# Altium PCB compactv2.PcbDoc
Units mm, origin at the board's own origin, x right, y up, seen from the top; angles counter-clockwise.
Board outline 100 x 100 mm, 4 copper layers (LV, Power Loops, HV Power, HV Signal), stack 1.369 mm thick; 57 components, 98 nets, 117 pads, 0 vias.
Unrouted connection lines stored in the file: 2.
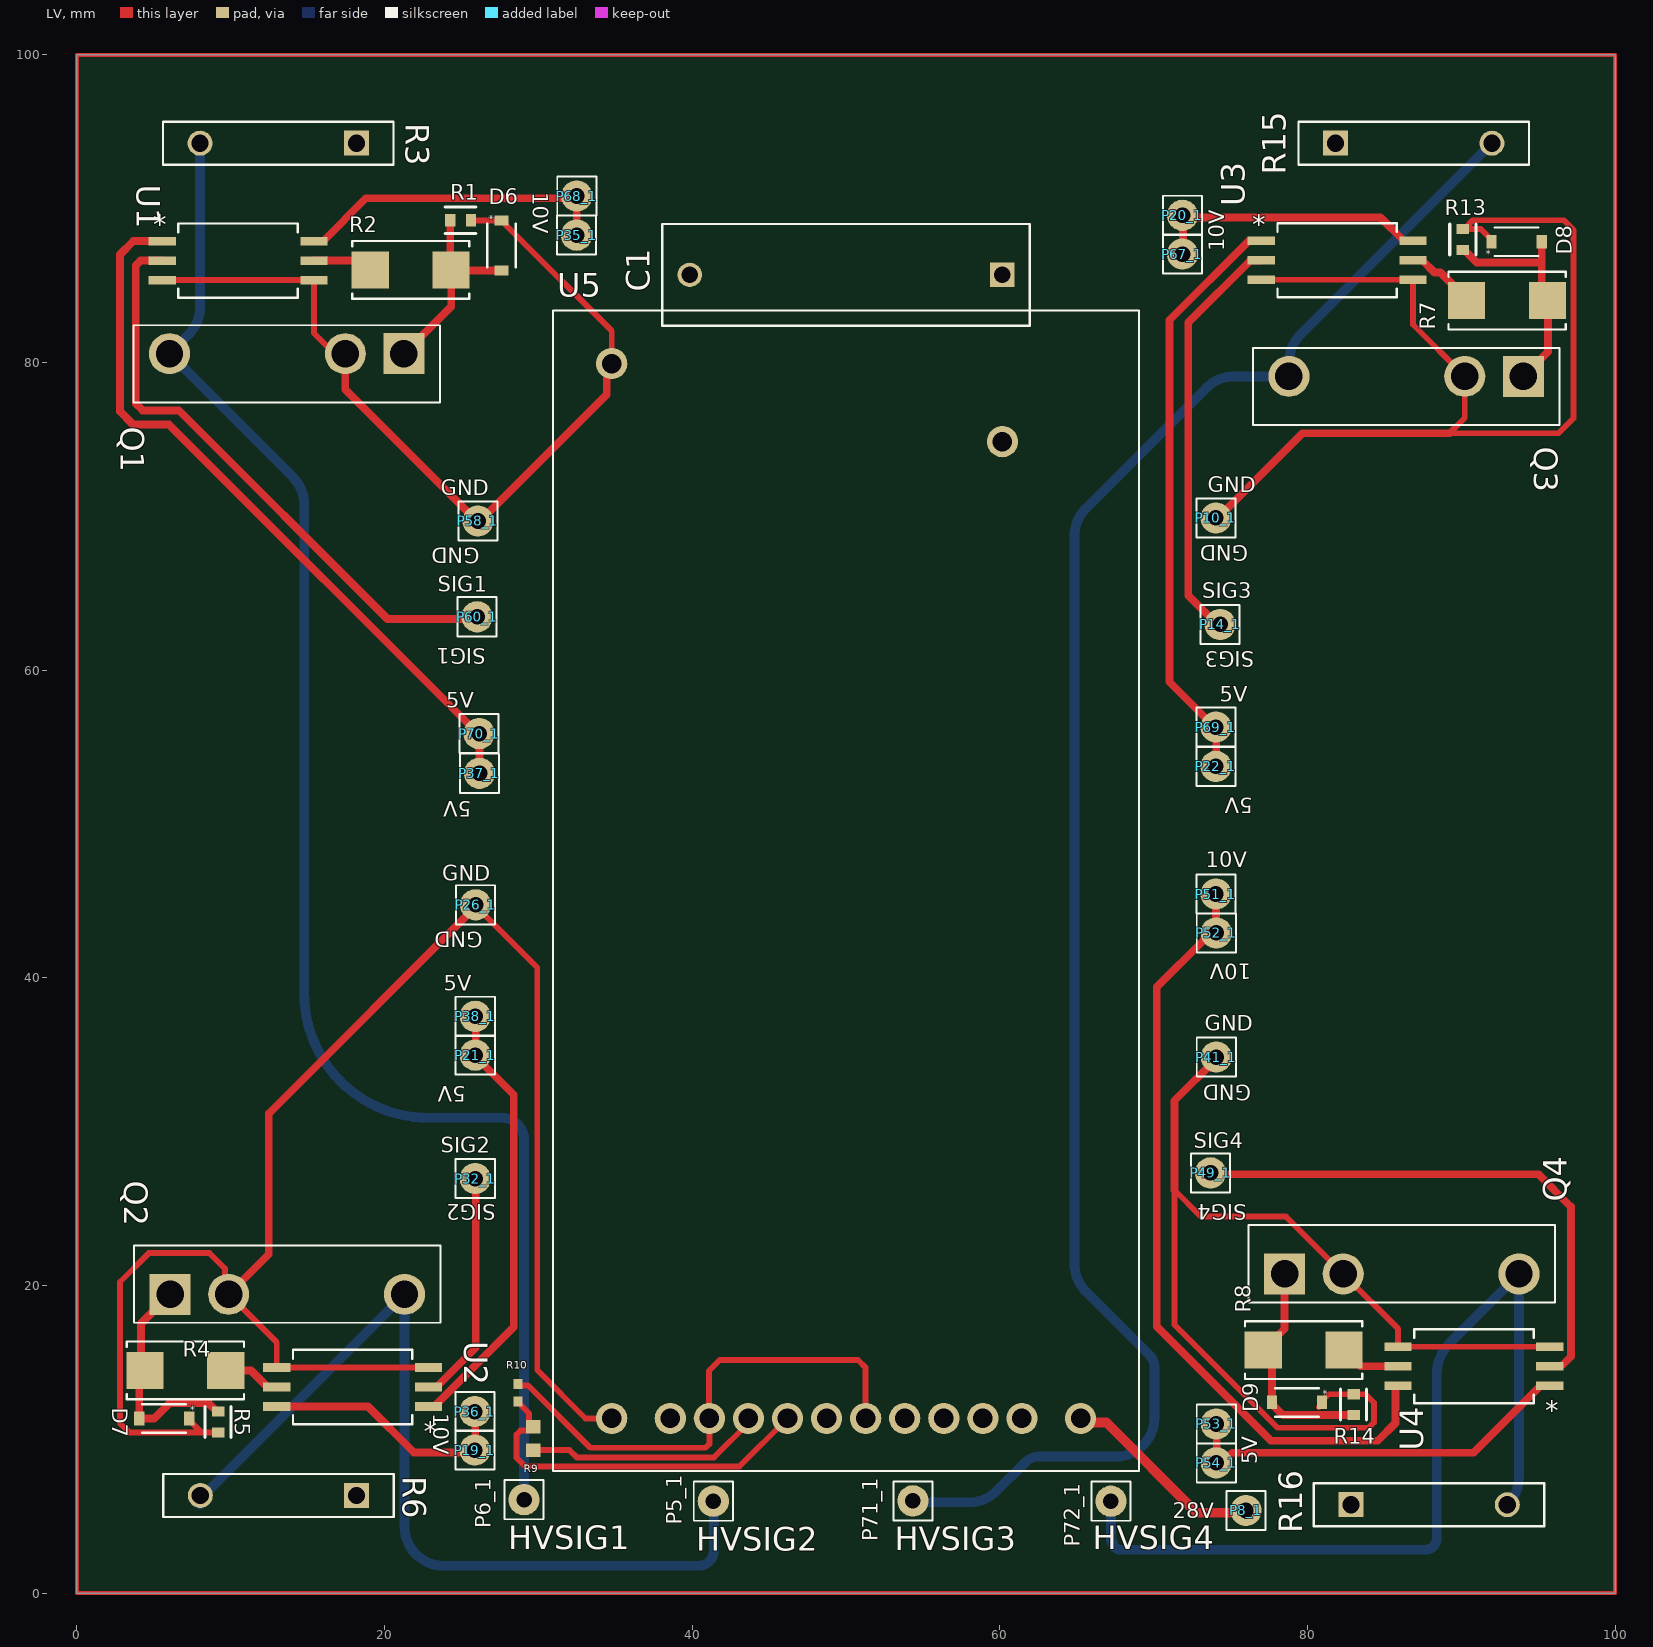
[diagram p0: LV view]
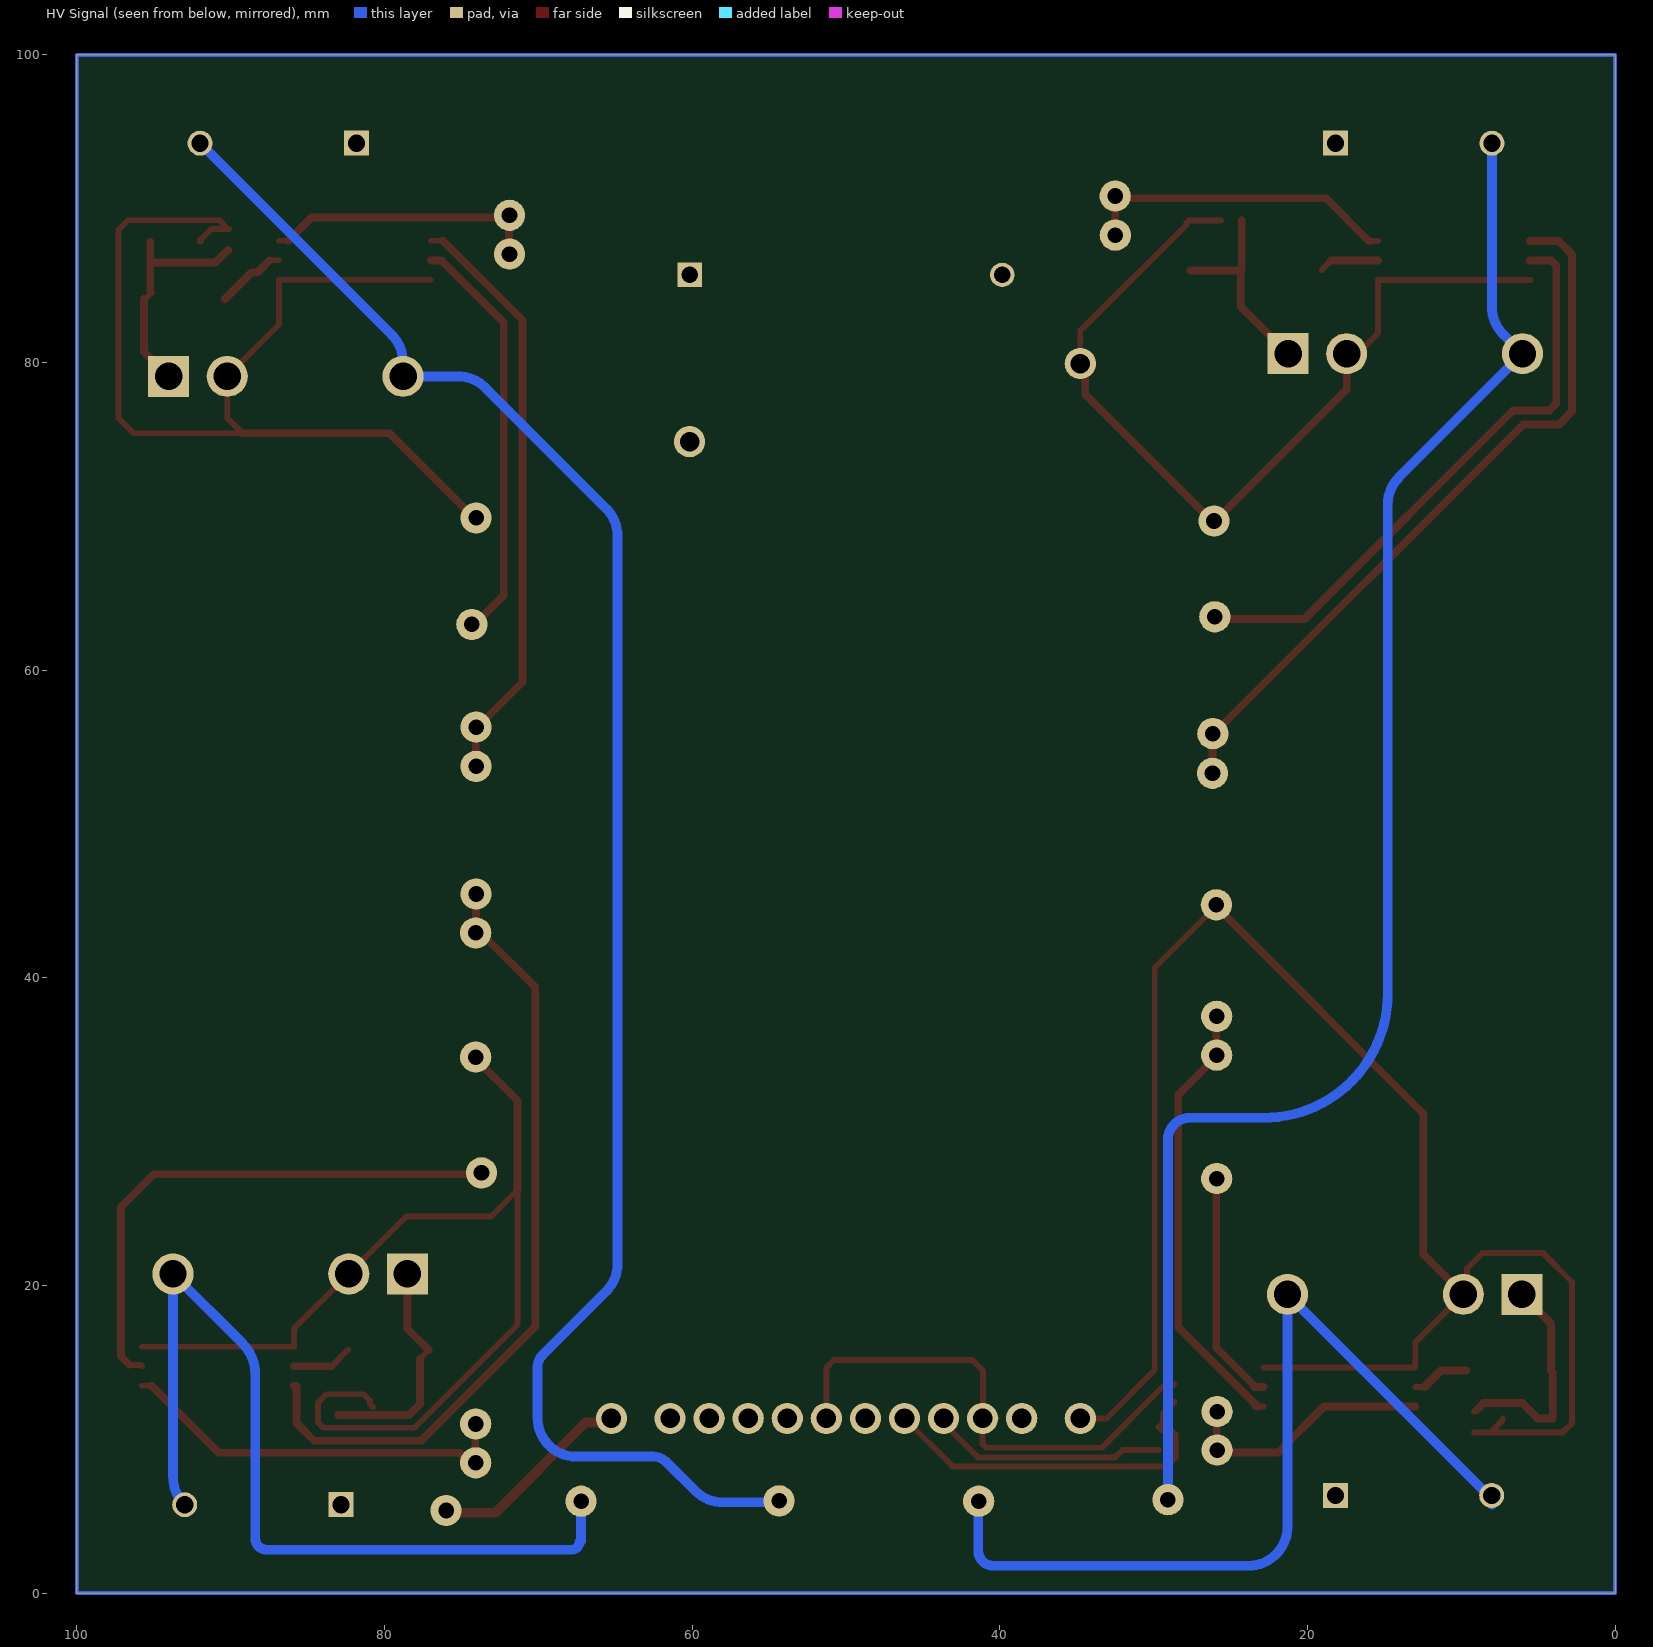
[diagram p1: HV Signal view, seen from below]
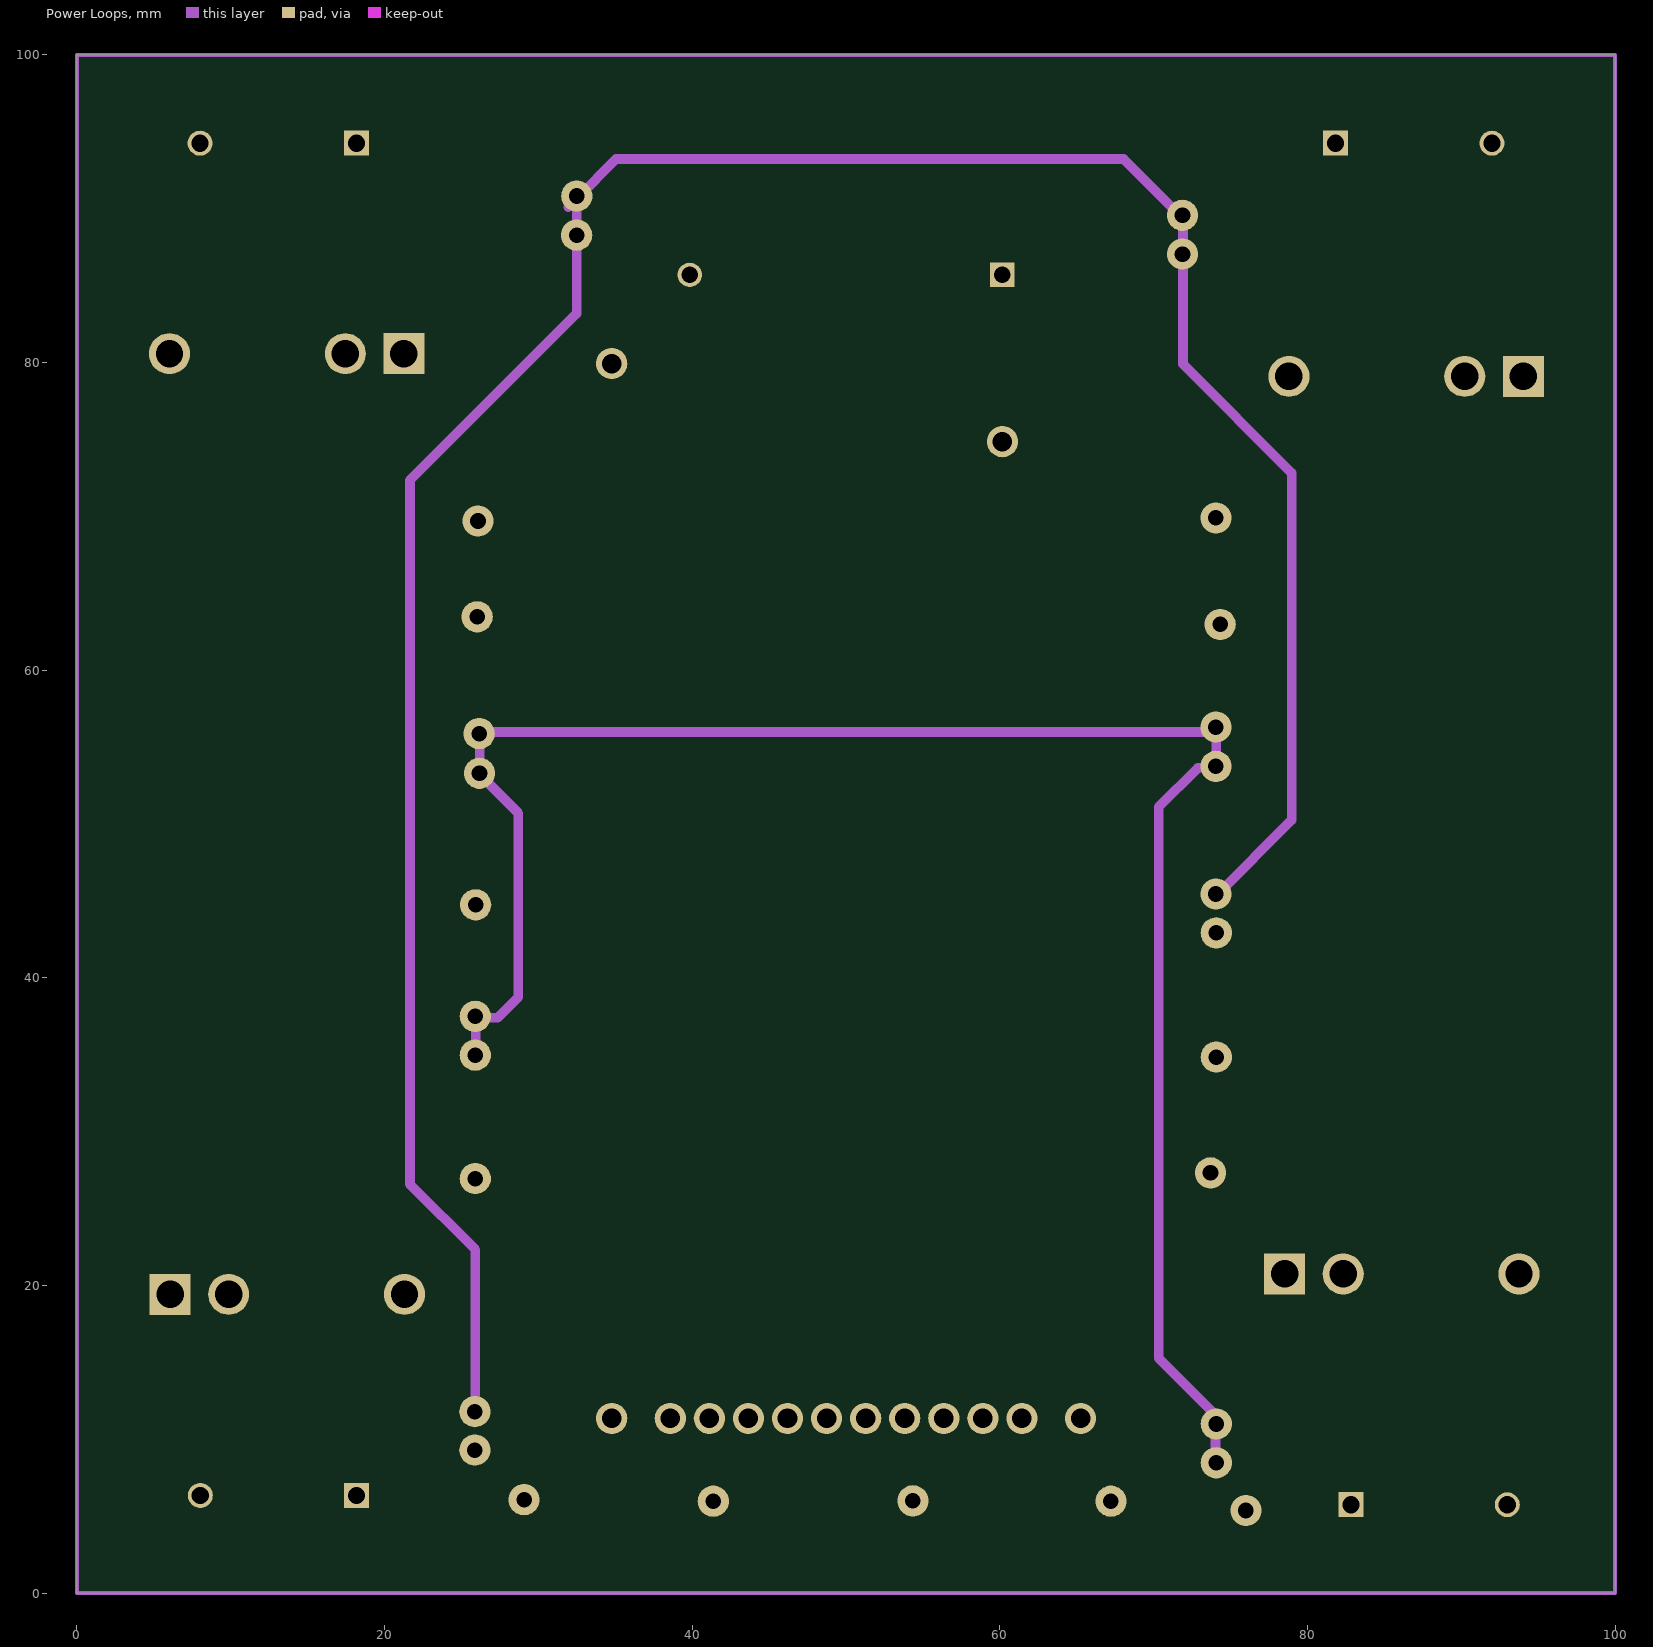
[diagram p2: Power Loops]
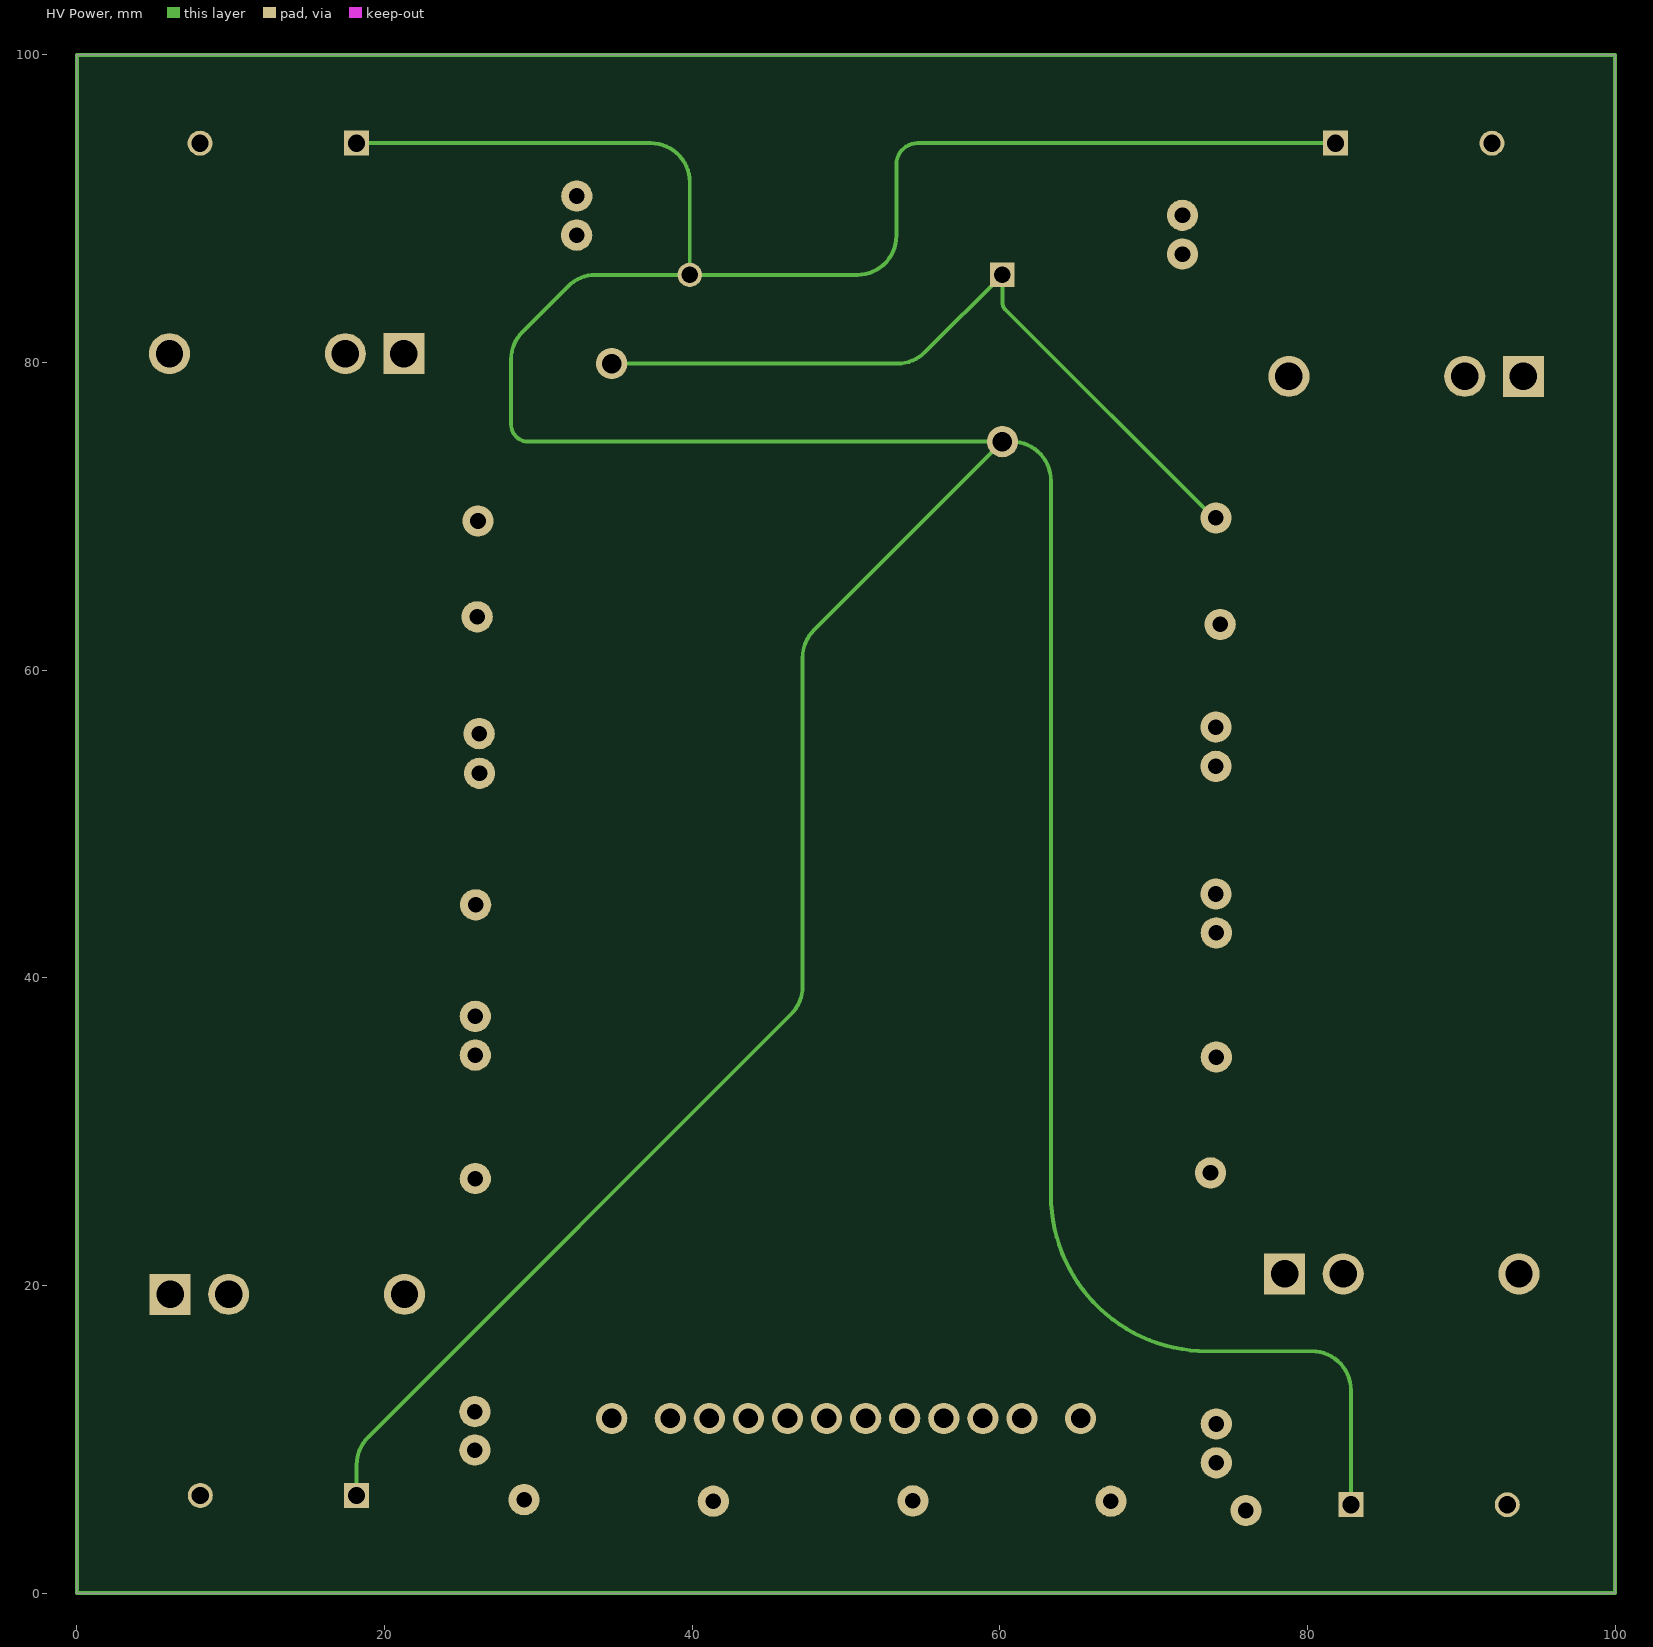
[diagram p3: HV Power]

## Layer stack, top to bottom
Top Solder: solder mask 0.0254, SM-001, Dk 4
LV: signal copper 0.035
Dielectric 1: prepreg 0.1295, PP-017, Dk 4.3
Dielectric 2: prepreg 0.1295, PP-017, Dk 4.3
Power Loops: signal copper 0.035
Dielectric 3: core 0.7112, Core-039, Dk 4.8
HV Power: signal copper 0.035
Dielectric 4: prepreg 0.1295, PP-017, Dk 4.3
Dielectric 5: prepreg 0.1295, PP-017, Dk 4.3
HV Signal: signal copper 0.035
Bottom Solder: solder mask 0.0254, SM-001, Dk 4

## Board outline
0,0 0,100 100,100 100,0

## Design rules (kind name [scope] priority, off if disabled: settings)
Clearance [All] p1 off: gap=0.254 ignorepadtopadclearanceinfootprint=FALSE except(0: Arc-Hole Track-Hole SMDPad-Hole THPad-Hole Via-Hole Fill-Hole Poly-Hole Region-Hole Text-Hole)
ComponentClearance [All] p1 off: gap=0.254 collisioncheckmode=3 verticalgap=0.254 showdistances=FALSE
Height [All] p1 off: minheight=0 maxheight=25.4 prefheight=12.7
PolygonConnect [All] p1: connectstyle=Relief reliefconductorwidth=0.254 reliefentries=4 polygonreliefangle="90 Angle" airgapwidth=0.254
RoutingVias [All] p1: holewidth=0.711 width=1.27 viastyle="Through Hole" minholewidth=0.711 minwidth=1.27 maxholewidth=0.711 maxwidth=1.27
ShortCircuit [All] p1 off: allowed=FALSE
SolderMaskExpansion [All] p1: expansion=0.102 istentingtop=FALSE
Width [All] p1 off: maxlimit=0.254 minlimit=0.254 preferedwidth=0.254
27 further rules are at their usual default settings.

## Classes and differential pairs
component class benchtopsch: C1 D6 D7 D8 D9 Q1 Q2 Q3 Q4 R1 R2 R3 R4 R5 R6 R7 R8 R9 R10 R13 R14 R15 R16 U1 U2 U3 U4 U5

## Components (designator, comment, footprint, x,y, rotation, side; value= is the part's Value field where it differs from the comment)
C1 "27n" "HV CAPACITOR" 60.162,85.7 r180 top
D6 "Zener Diode" "ZENER DIODE" 27.6,87.6 r270 top
D7 "Zener Diode" "ZENER DIODE" 5.675,11.35 r180 top
D8 "Zener Diode" "ZENER DIODE" 93.6,87.85 r0 top
D9 "Zener Diode" "ZENER DIODE" 79.325,12.4 r180 top
P5_1 "HVSIG2" VIA 41.373,5.973 r0 top (schematic designator P5)
P6_1 "HVSIG1" VIA 29.073,6.073 r0 top (schematic designator P6)
P8_1 "28V" VIA 75.998,5.373 r0 top (schematic designator P8)
P10_1 "GND" VIA 74.048,69.898 r0 top (schematic designator P10)
P14_1 "SIG3" VIA 74.325,62.975 r0 top (schematic designator P14)
P19_1 "20V" VIA 25.873,9.298 r0 top (schematic designator P19)
P20_1 "10V" VIA 71.873,89.573 r0 top (schematic designator P20)
P21_1 "5V" VIA 25.898,34.973 r0 top (schematic designator P21)
P22_1 "5V" VIA 74.048,53.748 r0 top (schematic designator P22)
P26_1 "GND" VIA 25.923,44.748 r0 top (schematic designator P26)
P32_1 "SIG2" VIA 25.898,26.948 r0 top (schematic designator P32)
P35_1 "20V" VIA 32.491,88.281 r0 top (schematic designator P35)
P36_1 "10V" VIA 25.873,11.798 r0 top (schematic designator P36)
P37_1 "5V" VIA 26.173,53.298 r0 top (schematic designator P37)
P38_1 "5V" VIA 25.898,37.498 r0 top (schematic designator P38)
P41_1 "GND" VIA 74.073,34.848 r0 top (schematic designator P41)
P49_1 "SIG4" VIA 73.698,27.323 r0 top (schematic designator P49)
P51_1 "10V" VIA 74.048,45.448 r0 top (schematic designator P51)
P52_1 "20V" VIA 74.073,42.923 r0 top (schematic designator P52)
P53_1 "5V" VIA 74.073,10.998 r0 top (schematic designator P53)
P54_1 "5V" VIA 74.073,8.473 r0 top (schematic designator P54)
P58_1 "GND" VIA 26.073,69.698 r180 top (schematic designator P58)
P60_1 "SIG1" VIA 26.023,63.473 r180 top (schematic designator P60)
P67_1 "20V" VIA 71.873,87.048 r0 top (schematic designator P67)
P68_1 "10V" VIA 32.498,90.823 r180 top (schematic designator P68)
P69_1 "5V" VIA 74.048,56.298 r0 top (schematic designator P69)
P70_1 "5V" VIA 26.153,55.872 r0 top (schematic designator P70)
P71_1 "HVSIG3" VIA 54.348,5.998 r0 top (schematic designator P71)
P72_1 "HVSIG4" VIA 67.223,5.973 r0 top (schematic designator P72)
Q1 "MOSFET" MOSFET 21.26,80.575 r180 top
Q2 "MOSFET" MOSFET 6.06,19.425 r0 top
Q3 "MOSFET" MOSFET 94.035,79.1 r180 top
Q4 "MOSFET" MOSFET 78.515,20.75 r0 top
R1 "10k" "LV RESISTOR" 24.95,89.25 r180 top
R2 "Resistor" "ZENER RESISTOR" 21.704,86.025 r180 top
R3 "1.25M" "HV RESISTOR" 18.172,94.259 r180 top
R4 "Resistor" "ZENER RESISTOR" 7.05,14.475 r0 top
R5 "10k" "LV RESISTOR" 9.175,11.125 r90 top
R6 "1.25M" "HV RESISTOR" 18.185,6.35 r180 top
R7 "Resistor" "ZENER RESISTOR" 92.975,84.025 r180 top
R8 "Resistor" "ZENER RESISTOR" 79.754,15.8 r0 top
R9 "330" "330 OHM" 29.675,10.05 r90 top
R10 "180" "180 OHM" 28.675,13.022 r90 top
R13 "10k" "LV RESISTOR" 90.1,88 r270 top
R14 "10k" "LV RESISTOR" 83,12.25 r270 top
R15 "1.25M" "HV RESISTOR" 81.828,94.259 r0 top
R16 "1.25M" "HV RESISTOR" 82.828,5.746 r0 top
U1 "Gate Driver" "GATE DRIVER" 10.475,86.625 r0 top
U2 "Gate Driver" "GATE DRIVER" 17.925,13.4 r180 top
U3 "Gate Driver" "GATE DRIVER" 81.925,86.65 r0 top
U4 "Gate Driver" "GATE DRIVER" 90.825,14.75 r180 top
U5 "Step Up Converter" "STEP UP CONVERTER" 63.818,10.985 r90 top

## Footprints (in the part's own frame and the unit in brackets; to place one, negate y for a bottom-side part, rotate by r counter-clockwise, add the part's x,y. Pads: shape width x height; smd on the part's side, far side on the other; paste and mask are expansions set on the pad)
"180 OHM" [mil] "RES_RK73H1E_KOA"
  rect 26x22 smd paste+0 mask+0: 1(-22.5,0) 2(22.5,0)
  body extent 0,0 10,10, height 10
"330 OHM" [mm] "RESC1508X55N"
  rect 0.87x0.93 smd: 1(-0.755,0) 2(0.755,0)
"GATE DRIVER" [mm] "ADuM4120"
  rect 1.766x0.561 smd paste+0 mask+0: 1(-4.931,1.27) 2(-4.931,0) 3(-4.931,-1.27) 4(4.931,-1.27) 5(4.931,0) 6(4.931,1.27)
  silkscreen extent -3.88,-2.41 3.88,2.41, body extent 0,0 0.25,0.25, height 0.25
"HV CAPACITOR" [mil] "SV17_AVX"
  rect 62x62 hole 42 mask+0: 1(0,0)
  round 62 hole 42 mask+0: 2(800,0)
  silkscreen extent -70,-130 870,130, body extent 0,0 10,10, height 10
"HV RESISTOR" [mil] "RES_SM10203_OHM"
  rect 64x64 hole 44 mask+0: 1(0,0)
  round 64 hole 44 mask+0: 2(400,0)
  silkscreen extent -95,-55 495,55, body extent 0,0 10,10, height 10
"LV RESISTOR" [mm] "Yageo_AC0603_IPC_C"
  rect 0.659x0.812 smd paste+0 mask+0: 1(-0.677,0) 2(0.677,0)
  silkscreen extent -1.01,-0.85 1.01,0.85, body extent -1.11,-0.55 1.11,0.55, height 0.25
MOSFET [mm]
  rect 2.67x2.67 hole 1.78: 1(0,0)
  round 2.67 hole 1.78: 2(3.81,0) 3(15.24,0)
  silkscreen extent -2.34,-1.85 17.58,3.17, body extent -2.34,-1.85 17.58,3.17, height 26.52
"STEP UP CONVERTER" [mm] "HRL30"
  round 2.032 hole 1.27: 1(0.37,29.05) 2(0.37,25.24) 3(0.37,22.7) 4(0.37,20.16) 5(0.37,17.62) 6(0.37,15.08) 7(0.37,12.54) 8(0.37,10) 9(0.37,7.46) 10(0.37,4.92) 11(0.37,2.38) 12(0.37,-1.43) 13(63.87,3.65) 14(68.95,29.05)
  silkscreen extent -3.05,-5.23 72.39,32.87
VIA [mil]
  round 80 hole 40: VIA(0,0)
  silkscreen extent -50,-50 50,50
"ZENER DIODE" [mil] "KDZVTR16B"
  rect 26x35 smd paste+0 mask+0: 1(-64,0) 2(64,0)
  silkscreen extent -56,-37 56,37, body extent 0,0 10,10, height 10
"ZENER RESISTOR" [mil] "BO_PWR3014"
  rect 95x95 smd paste+0 mask+0: 1(-103.5,0) 2(103.5,0)
  silkscreen extent -150,-74 150,74, body extent 0,0 10,10, height 10

## Part data
C1: library part Capacitor
D6 D7 D8 D9: "KDZVTR16B", Built_By=EMA_Matt, Copyright="Copyright (C) 2018 Accelerated Designs. All rights reserved", Manufacturer_Part_Number=KDZVTR16B, RefDes=RefDes, SourceLibrary=Rohm_2019-09-23, Type=DEV, Vendor="ROHM Semiconductor"
P5_1 P6_1 P8_1 P10_1 P14_1 P19_1 P20_1 P21_1 P22_1 P26_1 P32_1 P35_1 P36_1 P37_1 P38_1 P41_1 P49_1 P51_1 P52_1 P53_1 P54_1 P58_1 P60_1 P67_1 P68_1 P69_1 P70_1 P71_1 P72_1: library part "Output Point", "Thru hole via"
Q1 Q2 Q3 Q4: "IXTL2N4X0"
R1 R3 R5 R6 R9 R10 R13 R14 R15 R16: library part Resistor
U1 U2 U3 U4: "ADuM4120"
U5: "HRL30"

## Nets (pads, with @x,y where several pads share a name; then routed paths per layer and width w, separated by ;. In a path a pad name is that pad's centre, name@x,y a point inside that pad or via, vN(x,y) a via of type N, cw(c..) or ccw(c..) an arc to the next point about the centre after c; other vN are vias at no path point)
3kV: C1.2 R3.1 R6.1 R15.1 R16.1 U5.13 | length 299.9
  HV Power w0.254: R3.1 37.302,94.259 cw(c37.302,91.719) 39.842,91.719 C1.2 ; R6.1 18.185,8.333 cw(c20.725,8.333) 18.929,10.129 46.431,37.631 ccw(c44.635,39.427) 47.175,39.427 47.175,60.81 cw(c49.715,60.81) 47.919,62.606 U5.13 ; R15.1 54.659,94.259 ccw(c54.659,92.875) 53.275,92.875 53.275,88.24 cw(c50.735,88.24) 50.735,85.7 C1.2 ; R16.1 82.828,13.185 ccw(c80.288,13.185) 80.288,15.725 73.478,15.725 cw(c73.478,25.878) 63.325,25.878 63.325,72.315 ccw(c60.785,72.315) 60.785,74.855 U5.13 ; C1.2 33.727,85.7 ccw(c33.727,83.16) 31.931,84.956 28.969,81.994 ccw(c30.765,80.198) 28.225,80.198 28.225,75.98 ccw(c29.35,75.98) 29.35,74.855 U5.13
5V: P21_1.VIA P22_1.VIA P37_1.VIA P38_1.VIA P53_1.VIA P54_1.VIA P69_1.VIA P70_1.VIA U1.1 U2.1 U3.1 U4.1 | length 264.9
  LV w0.381: U1.1@5.514,87.925 U1.1 ; U2.1 23.23,12.13 U2.1@23.458,12.13 ; P37_1.VIA@26.18,53.22 P37_1.VIA@26.2,53.2 ; P70_1.VIA@26.18,55.774 P70_1.VIA@26.2,55.754 ; P54_1.VIA@74.075,8.325 P54_1.VIA@74.324,8.325 ; U3.1@76.195,87.92 U3.1 ; U4.1@95.153,13.48 U4.1
  LV w0.508: U1.1 3.67,87.895 2.8,87.025 2.8,76.825 3.65,75.975 5.979,75.975 26.18,55.774 P37_1.VIA@26.18,53.22 ; U2.1@23.23,12.13 28.4,17.3 28.4,32.4 25.925,34.875 P38_1.VIA@25.925,37.4 ; P22_1.VIA@74.075,53.65 74.075,56.2 71.025,59.25 71.025,82.75 U3.1@76.195,87.92 ; P54_1.VIA@74.1,8.375 P53_1.VIA@74.1,10.9 ; P54_1.VIA@74.324,8.325 75.124,9.125 90.798,9.125 U4.1@95.153,13.48
  Power Loops w0.635: P21_1.VIA@25.925,34.875 25.925,37.4 27.35,37.4 28.7,38.75 28.7,50.7 26.19,53.21 26.19,55.764 26.18,55.774 26.392,55.987 73.862,55.987 74.075,56.2 74.075,53.65 72.875,53.65 70.325,51.1 70.325,15.275 74.025,11.575 P54_1.VIA@74.025,9.05
10V: P19_1.VIA P20_1.VIA P35_1.VIA P36_1.VIA P51_1.VIA P52_1.VIA P67_1.VIA P68_1.VIA U1.6 U2.6 U3.6 U4.6 | length 284.2
  LV w0.381: U1.6 U1.6@16.008,87.895 ; P35_1.VIA@32.493,88.133 P35_1.VIA@32.496,88.137 ; P68_1.VIA@32.496,90.671 P68_1.VIA@32.5,90.675 ; P20_1.VIA@71.875,89.425 71.9,89.425 P20_1.VIA@71.9,89.475 ; P51_1.VIA@74.075,45.35 P51_1.VIA@74.1,45.325 ; U3.6@86.253,87.92 U3.6
  LV w0.508: U2.6 18.92,12.13 21.9,9.15 P19_1.VIA@25.875,9.15 ; U1.6@16.008,87.895 18.788,90.675 P68_1.VIA@32.5,90.675 ; P19_1.VIA@25.9,9.2 P36_1.VIA@25.9,11.7 ; P35_1.VIA@32.496,88.137 P68_1.VIA@32.496,90.671 ; P67_1.VIA@71.9,86.95 71.9,89.425 84.748,89.425 U3.6@86.253,87.92 ; P51_1.VIA@74.075,45.275 74.062,45.263 74.062,42.787 74.075,42.775 73.783,42.483 73.279,42.483 70.2,39.404 70.2,17.329 77.625,9.904 84.575,9.904 85.725,11.054 85.725,13.454 85.751,13.48 U4.6
  Power Loops w0.635: P36_1.VIA@25.9,11.7 25.9,22.325 21.65,26.575 21.65,72.35 32.493,83.193 32.493,88.133 P68_1.VIA@32.493,90.668 ; P68_1.VIA@31.94,90.115 P68_1.VIA@32.493,90.668 ; P68_1.VIA@32.493,90.675 P68_1.VIA@32.493,90.668 ; P51_1.VIA@74.075,45.35 78.975,50.25 78.975,72.825 71.9,79.9 71.9,89.475 71.8,89.475 68.05,93.225 35.05,93.225 32.5,90.675 P68_1.VIA@32.493,90.668
GND: C1.1 D6.1 D7.1 D8.1 D9.1 P10_1.VIA P26_1.VIA P41_1.VIA P58_1.VIA Q1.2 Q2.2 Q3.2 Q4.2 R1.1 R5.1 R13.1 R14.1 U1.3 U1.4 U2.3 U2.4 U3.3 U3.4 U4.3 U4.4 U5.1 U5.14 | length 360.1
  LV w0.381: U1.3 U1.4 15.406,81.919 17.45,79.875 Q1.2 ; D7.1 7.301,11.236 8.088,10.448 ; R5.1 8.088,10.448 ; U2.3 U2.4 12.994,16.301 Q2.2 9.618,19.677 9.618,21.107 8.625,22.1 4.675,22.1 2.8,20.225 2.8,11.05 3.402,10.448 8.088,10.448 ; R1.1 25.651,89.226 D6.1 27.714,89.226 27.854,89.086 27.854,88.972 34.768,82.058 U5.14 U5.14@34.452,79.619 ; P26_1.VIA@25.95,44.65 29.925,40.675 29.925,14.5 33.07,11.355 U5.1 ; P10_1.VIA@74.05,69.75 P10_1.VIA@74.05,69.775 ; U3.3 U3.4 86.856,82.469 Q3.2 90.225,76.4 89.225,75.4 96.325,75.4 97.3,76.375 97.3,88.625 96.675,89.25 90.75,89.25 R13.1@90.177,88.677 ; D9.1@80.747,12.083 80.951,12.286 D9.1 80.951,12.514 81.363,12.927 R14.1 83.773,12.927 84.325,12.375 84.325,11.1 83.975,10.75 78.05,10.75 71.35,17.45 71.35,26.2 73.075,24.475 78.6,24.475 Q4.2 85.894,17.181 U4.4 U4.3 ; R13.1 R13.1@90.177,88.677 ; D8.1 91.974,87.964 91.262,88.677 R13.1@90.177,88.677 ; D8.1@91.999,87.861 D8.1@91.999,87.975
  LV w0.508: Q2.2 12.47,22.025 12.47,31.17 P26_1.VIA@25.95,44.65 ; Q1.2@17.45,79.875 17.45,78.25 P58_1.VIA@26.1,69.6 ; P58_1.VIA@26.075,69.55 34.452,77.927 U5.14@34.452,79.619 ; 71.35,26.2 71.35,32 P41_1.VIA@74.1,34.75 ; P10_1.VIA@74.05,69.775 79.675,75.4 89.225,75.4
  HV Power w0.254: U5.14 53.345,79.935 ccw(c53.345,82.475) 55.141,80.679 C1.1 60.162,83.903 ccw(c60.803,83.903) 60.35,83.45 P10_1.VIA@74.05,69.75
HVSIG1: P6_1.VIA Q1.3 R3.2 | length 102.6
  HV Signal w0.635: R3.2 8.012,83.619 cw(c5.472,83.619) 7.268,81.823 Q1.3 14.04,72.555 cw(c12.244,70.759) 14.784,70.759 14.784,38.964 14.784,38.959 ccw(c22.85,38.966) 22.85,30.9 27.65,30.9 cw(c27.65,29.477) 29.073,29.477 P6_1.VIA
HVSIG2: P5_1.VIA Q2.3 R6.2 | length 59.5
  HV Signal w0.635: R6.2@8.012,5.746 cw(c8.956,5.746) 8.288,6.413 Q2.3 21.3,4.315 ccw(c23.84,4.315) 23.84,1.775 40.425,1.775 ccw(c40.425,2.75) 41.4,2.75 P5_1.VIA@41.4,5.875
HVSIG3: P71_1.VIA Q3.3 R15.2 | length 116.8
  HV Signal w0.635: P71_1.VIA@54.375,5.9 57.998,5.9 ccw(c57.998,8.44) 59.794,6.644 61.625,8.475 ; 61.681,8.531 61.625,8.475 ; R15.2 79.539,81.81 ccw(c81.335,80.014) 78.795,80.014 Q3.3 75.227,79.1 ccw(c75.227,76.56) 73.431,78.356 65.594,70.519 ccw(c67.39,68.723) 64.85,68.723 64.85,23.1 64.85,21.402 ccw(c67.39,21.402) 65.594,19.606 69.75,15.45 cw(c69.026,14.726) 70.05,14.726 70.05,11.374 cw(c67.551,11.374) 67.551,8.875 62.55,8.875 ccw(c62.55,7.606) 61.625,8.475
HVSIG4: P72_1.VIA Q4.3 R16.2 | length 58.8
  HV Signal w0.635: P72_1.VIA@67.225,5.825 67.225,3.425 ccw(c67.325,3.425) 67.325,3.325 ccw(c67.825,3.325) 67.825,2.825 87.675,2.825 ccw(c87.675,3.55) 88.4,3.55 88.4,14.237 cw(c91.196,14.237) 89.219,16.214 Q4.3 93.755,7.565 cw(c91.215,7.565) 93.011,5.769 R16.2
NetD6_2: D6.2 Q1.1 R1.2 R2.1 | length 13.3
  LV w0.381: R2.1@24.273,86.085 R2.1 R2.1@24.383,85.974
  LV w0.508: Q1.1 24.333,83.648 R2.1 ; R2.1@24.273,86.085 R1.2 ; R2.1@24.383,85.974 D6.2
NetD7_2: D7.2 Q2.1 R4.1 R5.2 | length 14.8
  LV w0.381: R4.1@4.049,14.332 R4.1@4.167,14.45 ; Q2.1@6.06,19.875 Q2.1@6.073,19.862 ; 8.575,12.35 8.649,12.276 8.649,12.251 ; R5.2@9.047,11.853 9.123,11.853 R5.2 R5.2@9.098,11.802
  LV w0.508: R4.1@4.049,14.332 D7.2 5.025,11.35 6.025,12.35 8.575,12.35 ; R4.1@4.167,14.45 4.167,17.532 Q2.1 ; 8.649,12.251 R5.2@9.047,11.853
NetD8_2: D8.2 Q3.1 R7.1 R13.2 | length 15.2
  LV w0.381: R13.2@90.062,87.286 R13.2 R13.2@90.177,87.323 ; Q3.1@93.977,79.158 Q3.1 ; R7.1@95.151,84.532 R7.1@95.558,84.125
  LV w0.508: R13.2@90.177,87.323 91,86.5 95.226,86.5 ; Q3.1 95.633,80.698 R7.1@95.633,84.125 ; R7.1@95.226,84.532 95.226,86.5 ; D8.2 95.226,86.5
NetD9_2: D9.2 Q4.1 R8.1 R14.2 | length 14.9
  LV w0.381: R8.1 R8.1@77.699,15.226 ; D9.2@77.699,12.286 D9.2 ; R14.2@82.987,11.561 R14.2
  LV w0.508: R8.1 78.515,17.19 Q4.1 ; D9.2@77.699,12.286 78.412,11.573 R14.2 ; D9.2 R8.1@77.699,15.226
NetP5_1: 
NetP6_1: 
NetP7_1: 
NetP8_1: 
NetP9_1: 
NetP10_1: 
NetP11_1: 
NetP12_1: 
NetP13_1: 
NetP14_1: 
NetP15_1: 
NetP16_1: 
NetP17_1: 
NetP18_1: 
NetP19_1: 
NetP20_1: 
NetP21_1: 
NetP22_1: 
NetP23_1: 
NetP24_1: 
NetP25_1: 
NetP26_1: 
NetP27_1: 
NetP28_1: 
NetP29_1: 
NetP30_1: 
NetP31_1: 
NetP32_1: 
NetP33_1: 
NetP34_1: 
NetP35_1: 
NetP36_1: 
NetP37_1: 
NetP38_1: 
NetP39_1: 
NetP40_1: 
NetP41_1: 
NetP42_1: 
NetP43_1: 
NetP44_1: 
NetP45_1: 
NetP46_1: 
NetP47_1: 
NetP48_1: 
NetP49_1: 
NetP50_1: 
NetP51_1: 
NetP52_1: 
NetP53_1: 
NetP54_1: 
NetP55_1: 
NetP56_1: 
NetP57_1: 
NetP58_1: 
NetP59_1: 
NetP60_1: 
NetP61_1: 
NetP62_1: 
NetP63_1: 
NetP64_1: 
NetP65_1: 
NetP66_1: 
NetP67_1: 
NetP68_1: 
NetP69_1: 
NetP70_1: 
NetP71_1: 
NetP72_1: 
NetR2_2: R2.2 U1.5 | length 3.9
  LV w0.381: R2.2@18.475,86.625 R2.2
  LV w0.508: U1.5 R2.2@18.475,86.625
NetR4_2: R4.2 U2.5 | length 3.8
  LV w0.381: U2.5@12.392,13.4 U2.5
  LV w0.508: R4.2 11.317,14.475 U2.5@12.392,13.4
NetR7_2: R7.2 U3.5 | length 4.6
  LV w0.381: U3.5 U3.5@87.458,86.65
  LV w0.508: U3.5@87.458,86.65 88.258,85.851 88.649,85.851 R7.2@90.375,84.125
NetR8_2: R8.2 U4.5 | length 3.9
  LV w0.381: R8.2 R8.2@83.433,14.75
  LV w0.508: R8.2@83.433,14.75 U4.5
NetR9_1: R9.1 U5.4 | length 15.4
  LV w0.381: R9.1 32.03,9.295 32.5,8.825 41.425,8.825 43.658,11.058 U5.4
NetR9_2: R9.2 R10.1 U5.5 | length 24.1
  LV w0.381: R10.1@28.687,12.437 R10.1 28.675,12.399 29.4,11.674 29.4,11.05 29.645,10.805 R9.2 29.43,10.56 28.835,10.56 28.575,10.3 28.575,8.8 29.15,8.225 43.068,8.225 U5.5
NetR10_2: R10.2 U5.3 U5.7 | length 33
  LV w0.381: R10.2 28.762,13.506 29.325,13.506 33.381,9.45 40.871,9.45 41.118,9.697 U5.3 ; U5.3@41.1,11.373 41.1,14.45 41.8,15.15 50.775,15.15 51.278,14.647 U5.7
  LV w0.635: U5.3@41.1,11.373 U5.3
NetU5_2: U5.2
NetU5_6: U5.6
NetU5_8: U5.8
NetU5_9: U5.9
NetU5_10: U5.10
NetU5_11: U5.11
NetU5_12: P8_1.VIA U5.12 | length 13.3
  LV w0.635: U5.12 65.515,11.088 66.937,11.088 72.8,5.225 P8_1.VIA@76,5.225
SIG1: P60_1.VIA U1.2 | length 38.8
  LV w0.508: U1.2 4.137,86.625 3.825,86.313 3.825,77.338 4.275,76.888 6.625,76.888 20.188,63.325 P60_1.VIA@26.025,63.325
SIG2: P32_1.VIA U2.2 | length 15.1
  LV w0.508: U2.2 23.458,13.4 23.485,13.426 23.485,13.51 25.925,15.95 P32_1.VIA@25.925,26.85
SIG3: P14_1.VIA U3.2 | length 26.8
  LV w0.508: P14_1.VIA@74.125,62.975 72.25,64.85 72.25,82.6 76.274,86.624 76.968,86.624 U3.2
SIG4: P49_1.VIA U4.2 | length 35.6
  LV w0.381: U4.2 95.846,14.84 U4.2@96.59,14.84
  LV w0.508: P49_1.VIA@73.725,27.225 95.025,27.225 97.125,25.125 97.125,15.375 U4.2@96.59,14.84

## Other copper
Multi-Layer:
  the board outline again, w0.254

## Silkscreen, mask and mechanical layers (free items; w line width, h text height)
Top Overlay:
  text "GND" at 76.146,68.121 h1 r180
  text "GND" at 26.196,67.971 h1 r180
  text "SIG1" at 26.571,61.421 h1 r180
  text "SIG3" at 76.546,61.221 h1 r180
  text "5V" at 76.446,51.696 h1 r180
  text "5V" at 25.646,51.471 h1 r180
  text "GND" at 26.396,42.996 h1 r180
  text "10V" at 76.346,40.921 h1 r180
  text "GND" at 76.346,33.046 h1 r180
  text "5V" at 25.271,32.946 h1 r180
  text "SIG2" at 27.221,25.271 h1 r180
  text "SIG4" at 76.046,25.271 h1 r180

## Text inside footprints (layer, text, board x,y; h text height)
D6: Top Overlay "*" at 26.609,89.607 h0.51 r270; Mechanical 13 "*" at 26.965,88.959 h1.27 r270
D7: Top Overlay "*" at 7.682,12.341 h0.51 r180; Mechanical 13 "*" at 7.034,11.985 h1.27 r180
D8: Top Overlay "*" at 91.593,86.859 h0.51; Mechanical 13 "*" at 92.241,87.215 h1.27
D9: Top Overlay "*" at 81.332,13.391 h0.51 r180; Mechanical 13 "*" at 80.684,13.035 h1.27 r180
U1: Top Overlay "*" at 4.973,88.329 h1.27; Mechanical 13 "*" at 6.789,87.566 h1.27
U2: Top Overlay "*" at 23.427,11.696 h1.27 r180; Mechanical 13 "*" at 21.612,12.459 h1.27 r180
U3: Top Overlay "*" at 76.423,88.354 h1.27; Mechanical 13 "*" at 78.238,87.591 h1.27
U4: Top Overlay "*" at 96.327,13.046 h1.27 r180; Mechanical 13 "*" at 94.512,13.809 h1.27 r180